# EAGLE board DCC2Arduino (EAGLE 8.1.0)
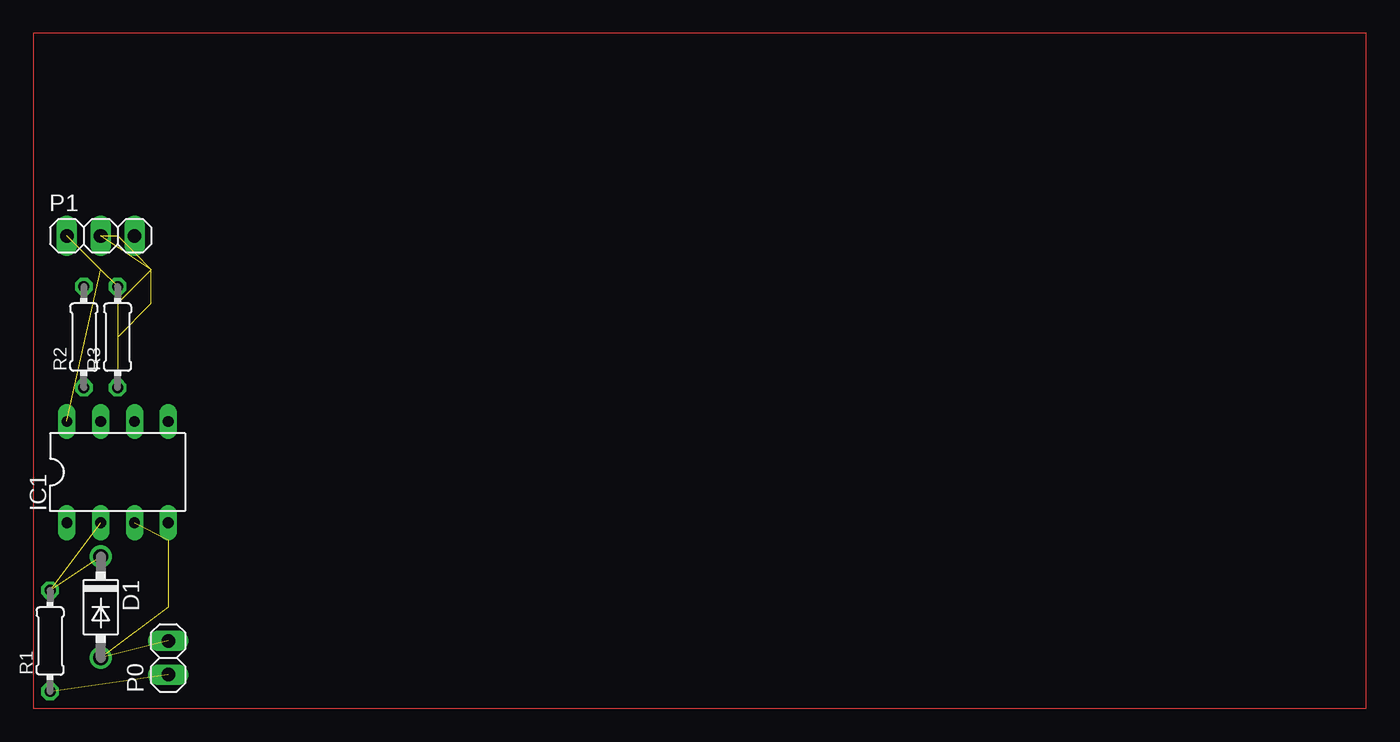
[diagram p0: board, top side]
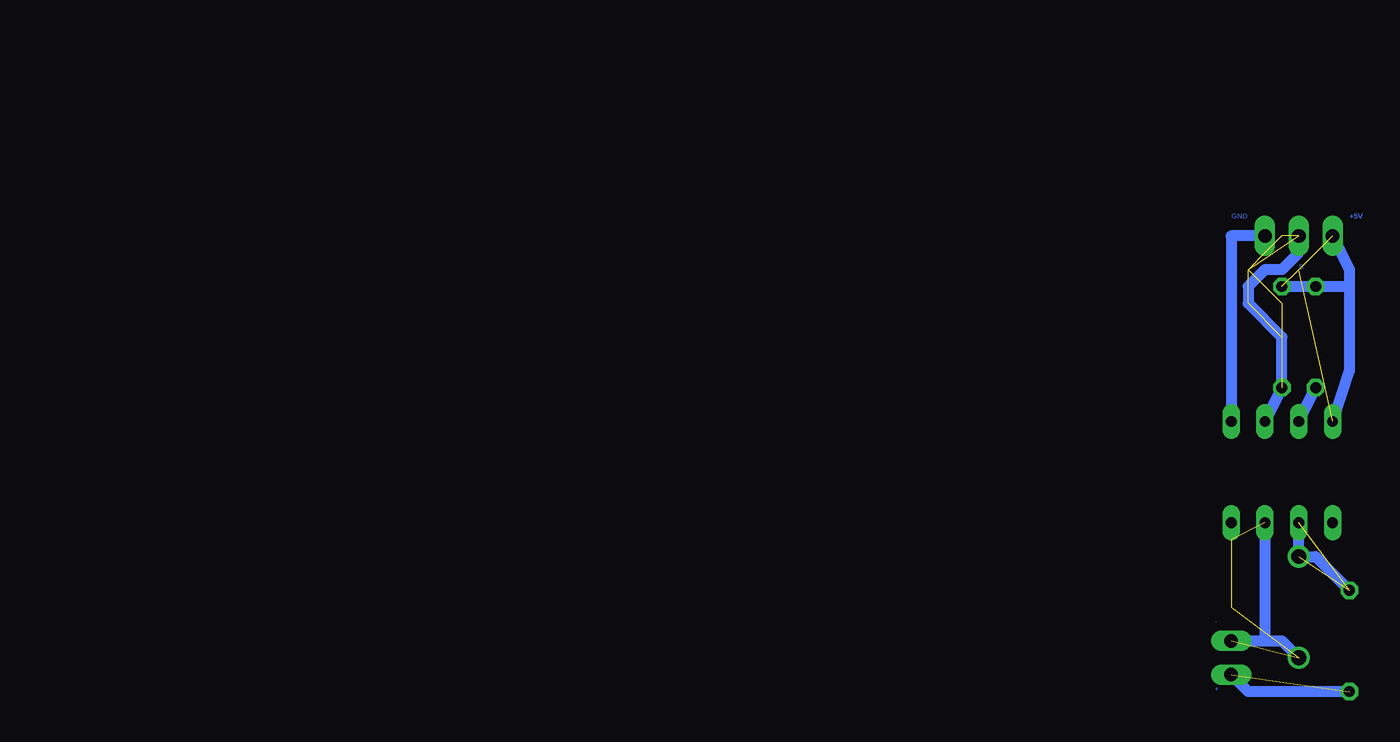
[diagram p1: board, bottom side, seen from below]

No outline drawn. Coordinates in mm, seen from the top.
Copper layers (1*16): Top 0.035mm / dielectric 1.5mm / Bottom 0.035mm
Design rules "default": minimum track width 10mil, minimum drill 24mil, track to track 8mil, track to pad 8mil, pad to pad 8mil, via to via 8mil, smd to smd 8mil, copper to edge 40mil, drill to drill 8mil, minimum pad ring 10mil, minimum via ring 8mil, stop-mask expansion 4mil, vias tented up to drill 0mil, thermal gap 10mil

## Footprints (pad centres in the part's own frame; a part is rotated, then mirrored left to right if it is on the bottom)
DO41-7 = drill 1.118: A 3.81,0; C -3.81,0
DIL08 = drill 0.813 long: 1 -3.81,-3.81; 2 -1.27,-3.81; 3 1.27,-3.81; 4 3.81,-3.81; 5 3.81,3.81; 6 1.27,3.81; 7 -1.27,3.81; 8 -3.81,3.81
1X02 = drill 1.016 long: 1 -1.27,0; 2 1.27,0
1X03 = drill 1.016 long: 1 -2.54,0; 2 0,0; 3 2.54,0
0204/7 = drill 0.813 octagon: 1 -3.81,0; 2 3.81,0

## Placement (x,y rotation side)
D1  1N4148  [DO41-7]  5.08,7.62 270 top
IC1  6N137  [DIL08]  6.35,17.78 0 top
P0  [1X02]  10.16,3.81 90 top
P1  [1X03]  5.08,35.56 0 top
R1  1k  [0204/7]  1.27,5.08 90 top
R2  10k  [0204/7]  3.81,27.94 90 top
R3  10k  [0204/7]  6.35,27.94 90 top

## Library data of the parts
D1 = diode
IC1 = ic-package
P0 P1 = pinhead
R1-R3 = resistor

## Nets
S$2: P0.1 R1.1
S$3: IC1.5 P1.3
S$4: D1.A IC1.3 P0.2
S$5: D1.C IC1.2 R1.2
S$6: IC1.8 P1.1 R3.2
S$7: IC1.7 R2.1
S$9: IC1.6 P1.2 R3.1

## Tracks (layer width: path | path; a pad name or v marks a point on that pad's centre or on a via)
S$1
  Top 0: 0,0 100.33,0 100.33,50.8 0,50.8 0,0
S$2  (1 unrouted)
  Bottom 0.813: R1.1 8.89,1.27 P0.1
S$3
  Bottom 0.813: P1.3 10.16,35.56 IC1.5
S$4  (5 unrouted)
  Bottom 0.813: P0.2 7.62,5.08 | 7.62,5.08 6.35,5.08 D1.A | IC1.3 7.62,5.08
S$5  (2 unrouted)
  Bottom 0.813: R1.2 3.81,11.43 D1.C IC1.2
S$6  (3 unrouted)
  Bottom 0.813: P1.1 1.27,33.02 1.27,31.75 | 1.27,31.75 1.27,25.4 IC1.8 | R3.2 1.27,31.75
S$7
  Bottom 0.813: IC1.7 R2.1
S$9  (8 unrouted)
  Bottom 0.813: IC1.6 R3.1 6.35,27.94 8.89,30.48 8.89,31.75 7.62,33.02 6.35,33.02 5.08,34.29 P1.2

## Text on the board
Bottom: +5V | +5V | GND | S | - | +